# Altium PCB piezo-driver1.PcbDoc (part 2 of 2)
Units mm, origin at the board's own origin, x right, y up, seen from the top; angles counter-clockwise.
Board outline 53.7 x 52 mm, 2 copper layers (Top Layer, Bottom Layer), stack 1.569 mm thick; 104 components, 76 nets, 406 pads, 150 vias.
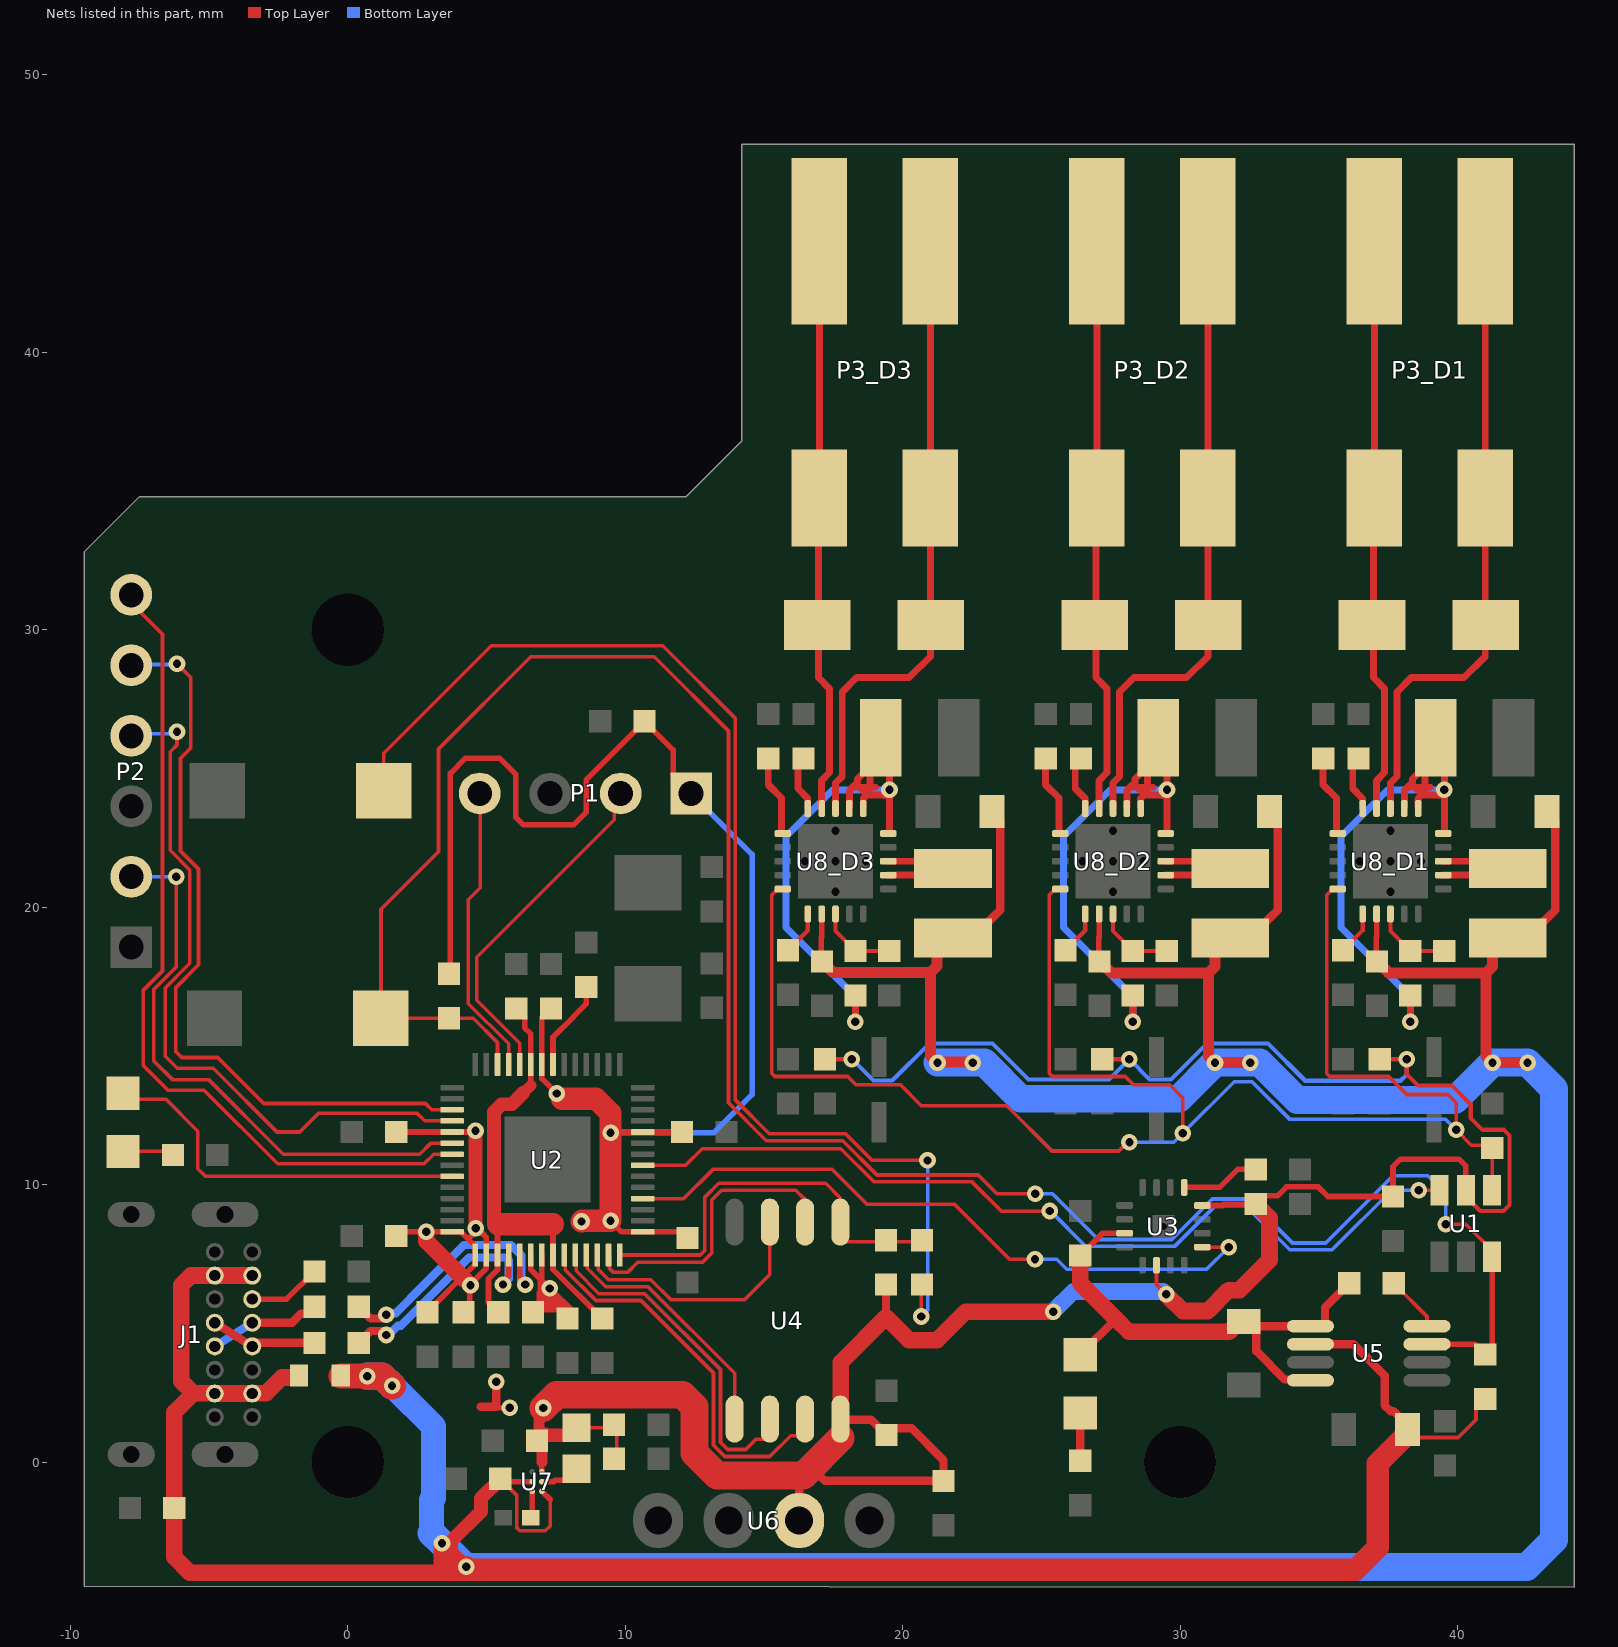
[diagram p2: the nets of this part, all layers, seen from the top]

## Via types
v1: diameter 0.6, hole 0.3, Top Layer to Bottom Layer, tented both sides, 141 vias
v2: diameter 0.6, hole 0.3, Top Layer to Bottom Layer, tented top, 9 vias

## Nets (pads, with @x,y where several pads share a name; then routed paths per layer and width w, separated by ;. In a path a pad name is that pad's centre, name@x,y a point inside that pad or via, vN(x,y) a via of type N, cw(c..) or ccw(c..) an arc to the next point about the centre after c; other vN are vias at no path point) (continued)
NetC29_D1_1: C29_D1.1 R18_D1.2 U8_D1.10 U8_D1.11 U8_D1.12 | length 23.3
  Top Layer w0.25: U8_D1.12@38.082,23.603 38.087,23.608 38.087,24.213 38.198,24.324 ; v1(38.298,15.874) R18_D1.2@38.298,16.824 ; U8_D1.11@38.582,23.603 38.582,23.918 38.702,24.039 ; 39.023,24.324 38.823,24.324 ; v1@39.348,24.024 39.333,24.039 38.702,24.039 ; U8_D1.10@39.527,22.658 v1(39.527,24.232) 39.527,25.806 C29_D1.1@39.219,26.114 38.823,25.718 C29_D1.1@38.823,25.068 ; 38.198,24.324 38.46,24.324 ; 38.198,24.324 38.373,24.499 38.373,24.618 C29_D1.1@38.823,25.068 ; 38.46,24.324 38.658,24.324 ; 38.46,24.324 38.702,24.082 38.702,24.039 ; 38.658,24.324 38.823,24.324 ; 38.658,24.324 38.823,24.159 ; 38.702,24.039 38.823,24.159 ; 38.823,24.159 38.823,24.324 ; 38.823,24.324 C29_D1.1@38.823,25.068
  Bottom Layer w0.25: v1(38.298,15.874) 38.298,16.362 38.298,16.774 35.798,19.274 35.798,22.549 37.481,24.232 v1(39.527,24.232)
NetC29_D2_1: C29_D2.1 R18_D2.2 U8_D2.10 U8_D2.11 U8_D2.12 | length 23.3
  Top Layer w0.25: U8_D2.12@28.082,23.603 28.087,23.608 28.087,24.213 28.198,24.324 ; v1(28.298,15.874) R18_D2.2@28.298,16.824 ; U8_D2.11@28.582,23.603 28.582,23.918 28.703,24.039 ; 29.023,24.324 28.823,24.324 ; v1@29.348,24.024 29.333,24.039 28.703,24.039 ; U8_D2.10@29.527,22.658 v1(29.527,24.232) 29.527,25.806 C29_D2.1@29.219,26.114 28.823,25.718 C29_D2.1@28.823,25.068 ; 28.198,24.324 28.461,24.324 ; 28.198,24.324 28.373,24.499 28.373,24.618 C29_D2.1@28.823,25.068 ; 28.461,24.324 28.658,24.324 ; 28.461,24.324 28.703,24.082 28.703,24.039 ; 28.658,24.324 28.823,24.324 ; 28.658,24.324 28.823,24.159 ; 28.703,24.039 28.823,24.159 ; 28.823,24.159 28.823,24.324 ; 28.823,24.324 C29_D2.1@28.823,25.068
  Bottom Layer w0.25: v1(28.298,15.874) 28.298,16.362 28.298,16.774 25.798,19.274 25.798,22.549 27.481,24.232 v1(29.527,24.232)
NetC29_D3_1: C29_D3.1 R18_D3.2 U8_D3.10 U8_D3.11 U8_D3.12 | length 23.3
  Top Layer w0.25: U8_D3.12@18.082,23.603 18.087,23.608 18.087,24.213 18.198,24.324 ; v1(18.298,15.874) R18_D3.2@18.298,16.824 ; U8_D3.11@18.582,23.603 18.582,23.918 18.703,24.039 ; 19.023,24.324 18.823,24.324 ; v1@19.348,24.024 19.333,24.039 18.703,24.039 ; U8_D3.10@19.527,22.658 v1(19.527,24.232) 19.527,25.806 C29_D3.1@19.219,26.114 18.823,25.718 C29_D3.1@18.823,25.068 ; 18.198,24.324 18.461,24.324 ; 18.198,24.324 18.373,24.499 18.373,24.618 C29_D3.1@18.823,25.068 ; 18.461,24.324 18.658,24.324 ; 18.461,24.324 18.703,24.082 18.703,24.039 ; 18.658,24.324 18.823,24.324 ; 18.658,24.324 18.823,24.159 ; 18.703,24.039 18.823,24.159 ; 18.823,24.159 18.823,24.324 ; 18.823,24.324 C29_D3.1@18.823,25.068
  Bottom Layer w0.25: v1(18.298,15.874) 18.298,16.362 18.298,16.774 15.798,19.274 15.798,22.549 17.481,24.232 v1(19.527,24.232)
NetC30_D1_1: C30_D1.1 U8_D1.1 | length 1.6
  Top Layer w0.15: C30_D1.1@35.873,18.449 36.582,19.158 U8_D1.1@36.582,19.758
NetC30_D2_1: C30_D2.1 U8_D2.1 | length 1.6
  Top Layer w0.15: C30_D2.1@25.873,18.449 26.582,19.158 U8_D2.1@26.582,19.758
NetC30_D3_1: C30_D3.1 U8_D3.1 | length 1.6
  Top Layer w0.15: C30_D3.1@15.873,18.449 16.582,19.158 U8_D3.1@16.582,19.758
NetD1_1: D1.1 U2.37 | length 13.9
  Top Layer w0.13: D1.1@-8.1,13.3 -7.875,13.075 -6.55,13.075 -5.4,11.925 -5.4,10.575 -5.125,10.3 U2.37@3.765,10.3
NetD1_2: D1.2 R10.2 | length 1.9
  Top Layer w0.13: D1.2@-8.1,11.2 -6.425,11.2 R10.2@-6.3,11.075
NetD2_2: D2.2 R12.2 | length 1.7
  Top Layer w0.3: R12.2@26.4,0.05 D2.2@26.4,1.775
NetJ1_A5: J1.A5 R8.2 | length 2.7
  Top Layer w0.2: J1.A5@-3.44,5.875 -2.2,5.875 R8.2@-1.2,6.875
NetL2_D1_1: L2_D1.1 U8_D1.7 U8_D1.8 | length 4.9
  Top Layer w0.25: U8_D1.7@39.452,21.158 41.577,21.158 L2_D1.1@41.814,21.395 41.551,21.658 U8_D1.8@39.452,21.658
NetL2_D2_1: L2_D2.1 U8_D2.7 U8_D2.8 | length 4.9
  Top Layer w0.25: U8_D2.7@29.452,21.158 31.577,21.158 L2_D2.1@31.814,21.395 31.551,21.658 U8_D2.8@29.452,21.658
NetL2_D3_1: L2_D3.1 U8_D3.7 U8_D3.8 | length 4.9
  Top Layer w0.25: U8_D3.7@19.452,21.158 21.577,21.158 L2_D3.1@21.814,21.395 21.551,21.658 U8_D3.8@19.452,21.658
NetPL2_1: PL2.1 R2.2 | length 45.2
  Top Layer w0.13: PL2.1@1.3,24.2 1.3,25.55 5.175,29.425 11.35,29.425 13.975,26.8 13.975,13.053 15.189,11.839 17.943,11.839 18.907,10.875 v1(20.9,10.875) ; v1(20.675,5.25) 20.675,6.375 R2.2@20.7,6.4
  Bottom Layer w0.13: v1(20.675,5.25) 20.9,5.475 v1(20.9,10.875)
NetR4_1: R4.1 U2.21 | length 3.3
  Top Layer w0.2: U2.21@7.4,14.335 7.4,15.314 8.15,16.064 8.15,16.075 8.6,16.525 R4.1@8.6,17.125
NetR11_1: R11.1 U5.8 | length 2
  Top Layer w0.13: R11.1@37.7,6.45 38.9,5.25 U5.8@38.9,4.9
NetR15_1: R15.1 U7.C1 | length 1.1
  Top Layer w0.2: R15.1@6.6,-2.1 6.65,-2.05 U7.C1@6.65,-1.05
NetR18_D1_1: R18_D1.1 R19_D1.2 U8_D1.3 | length 2.9
  Top Layer w0.15: U8_D1.3@37.582,19.758 37.582,19.14 R18_D1.1@38.298,18.424 39.52,18.424 R19_D1.2@39.522,18.422
NetR18_D2_1: R18_D2.1 R19_D2.2 U8_D2.3 | length 2.9
  Top Layer w0.15: U8_D2.3@27.582,19.758 27.582,19.14 R18_D2.1@28.298,18.424 29.52,18.424 R19_D2.2@29.522,18.422
NetR18_D3_1: R18_D3.1 R19_D3.2 U8_D3.3 | length 2.9
  Top Layer w0.15: U8_D3.3@17.582,19.758 17.582,19.14 R18_D3.1@18.298,18.424 19.52,18.424 R19_D3.2@19.522,18.422
P1.1V: C12.1 C13.1 C14.1 U2.23 U2.45 U2.50 | length 18.5
  Top Layer w0.2: C14.1@5.425,5.4 5.075,5.75 5.075,6.61 5.4,6.935 U2.45@5.4,7.465 5.4,8.2 5.6,8.4 ; C13.1@6.075,16.35 6.375,16.05 6.375,15.65 6.6,15.425 U2.23@6.6,14.335 6.6,13.575 ; 7.4,8.575 U2.50@7.4,7.465 7.4,6.95 C12.1@9.175,5.175
  Top Layer w0.4: 5.275,8.725 5.6,8.4 ; 6.325,13.3 6.6,13.575
  Top Layer w0.5: 5.275,8.725 5.275,12.625 5.55,12.9 5.925,12.9 6.325,13.3
  Top Layer w0.8: 5.425,8.575 7.4,8.575
P3.3V: C1.1 C2.1 C3.1 C4.1 C5.1 C6.1 C7.1 C8.1 C9.1 C10.1 C11.1 C15.2 C19.1 C25.1 C27.1 L1.2 P1.1 R1.1 R3.2 R13.2 R14.2 R17_D1.1 R17_D2.1 R17_D3.1 U1.5 U2.1 U2.10 U2.22 U2.33 U2.42 U2.43 U2.44 U2.48 U2.49 U3.10 U3.16 U4.8 U6.2 U7.A2 | length 195.4
  Top Layer w0.13: L1.2@8.3,1.235 9.585,1.235 9.7,1.35 R13.2@9.7,0.125 ; U3.10@29.2,7.05 U3.10@29.15,7.1 29.15,6.4 v1(29.5,6.05)
  Top Layer w0.15: R17_D3.1@17.198,14.524 v1(18.173,14.524) ; R17_D2.1@27.198,14.524 v1(28.173,14.524) ; R17_D1.1@37.198,14.524 v1(38.173,14.524) 38.173,13.977 38.575,13.575 39.8,13.575 40.475,12.9 40.475,12.4 40.897,11.978 41.673,11.978 41.875,11.776 41.875,9.274 41.656,9.055 40.82,9.055 40.3,9.575 U1.5@40.3,9.8
  Top Layer w0.2: C3.1@1.75,8.15 1.9,8.3 v1(2.832,8.3) U2.42@3.765,8.3 4.085,8.3 4.342,8.043 ; C4.1@1.75,11.9 U2.33@3.765,11.9 4.555,11.9 v1(4.605,11.95) ; C1.1@2.875,5.4 3.175,5.7 3.175,5.72 4.127,6.673 ; R1.1@3.65,17.6 3.7,17.65 3.7,24.825 4.25,25.375 5.475,25.375 6.05,24.8 6.05,23.25 6.325,22.975 8.15,22.975 8.6,23.425 8.6,24.6 C9.1@10.7,26.7 11.73,25.67 11.73,24.75 P1.1@12.38,24.1 ; C11.1@4.175,5.4 C11.1@4.475,5.1 ; C11.1@4.4,5.4 v1@4.4,6.4 ; v1@4.612,8.441 v1@4.625,8.427 ; v1@4.612,11.937 v1@4.625,11.95 ; v1(4.618,8.427) 4.618,8.332 v1@4.7,8.25 ; 4.795,2 4.795,1.962 v1(5.837,1.962) ; 5.35,2 5.35,2.075 ; C8.1@6.6,5.7 C8.1@6.9,5.4 ; U2.48@6.6,7.465 6.6,6.935 6.868,6.668 ; U7.A2@7,-0.35 7,0.01 ; U2.49@7,7.465 7,6.55 ; C5.1@7.325,16.35 7,16.025 U2.22@7,14.335 7,13.825 v1@7.725,13.1 ; C2.1@8.15,5.4 7.95,5.6 ; v1(9.475,8.7) 9.875,8.3 U2.1@10.635,8.3 12.025,8.3 C6.1@12.25,8.075 ; v1(9.475,11.875) 9.5,11.9 U2.10@10.635,11.9 C7.1@12.052,11.9 ; U3.16@30.8,9.25 31.515,9.25 31.565,9.3 C19.1@32.725,9.3 33.025,9.6 33.514,9.6 33.834,9.92 34.98,9.92 35.325,9.575 C10.1@37.675,9.575 37.675,10.65 37.95,10.925 40.05,10.925 40.3,10.675 U1.5@40.3,9.8 ; 4.127,6.673 4.6,7.145 U2.43@4.6,7.465 4.6,7.785 4.342,8.043 ; 4.127,6.673 v1@4.4,6.4 ; 4.342,8.043 4.55,8.25 v1@4.7,8.25 ; v1@4.4,6.4 v1(4.425,6.375) 4.425,6.413 5,6.988 U2.44@5,7.465 5,8.1 4.85,8.25 v1@4.7,8.25 ; 6.868,6.668 6.937,6.598 6.937,6.137 ; 6.868,6.668 6.882,6.668 7,6.55 ; C8.1@6.9,5.4 6.9,5.85 ; C8.1@6.9,5.4 C8.1@7,5.5 ; 6.9,5.85 6.9,6.1 6.937,6.137 ; 6.9,5.85 7,5.95 ; 6.937,6.137 v1@7,6.2 ; 6.937,6.137 7,6.137 ; C8.1@7,5.5 7.141,5.641 7.2,5.7 7.34,5.7 7.421,5.781 ; C8.1@7,5.5 7,5.95 ; 7,5.95 7,6.137 ; 7,5.95 7.003,5.953 7.388,5.953 ; 7,6.137 v1@7,6.2 ; 7,6.137 v1@7.204,6.137 ; v1@7,6.2 v1@7,6.341 ; v1@7,6.341 v1@7.204,6.137 ; v1@7,6.341 7,6.482 ; 7,6.482 7,6.55 ; 7,6.482 7.068,6.482 ; 7,6.55 7.068,6.482 ; 7.068,6.482 v1(7.288,6.262) 7.509,6.041 ; v1@7.204,6.137 7.388,5.953 ; 7.388,5.953 7.421,5.953 ; 7.388,5.953 7.421,5.921 ; 7.421,5.781 7.421,5.921 ; 7.421,5.781 7.421,5.641 7.7,5.641 ; 7.421,5.921 7.421,5.953 ; 7.421,5.921 7.7,5.641 ; 7.421,5.953 7.509,6.041 ; 7.509,6.041 7.95,5.6 ; 7.7,5.641 7.7,5.6 7.95,5.6
  Top Layer w0.3: 4.795,2 5.35,2 ; 5.35,2.075 v1(5.35,2.9) ; U6.2@16.27,-2.1 16.27,-0.635 16.425,-0.48 ; 16.7,-0.175 16.715,-0.19 17.2,-0.675 C25.1@21.475,-0.675 21.475,0.069 20.319,1.225 19.675,1.225 C15.2@19.425,0.975 18.875,1.525 17.78,1.525 U4.8@17.8,1.545 ; 19.4,5.225 R3.2@19.4,6.4
  Top Layer w0.4: v1@6.875,2.125 6.9,2.1 6.9,0.775 7.008,0.667 7.008,0.01
  Top Layer w0.5: v1@4.612,8.441 v1@4.612,11.937 ; C27.1@6.9,0.775 C27.1@7.095,0.97 ; C27.1@7.125,1 C27.1@7.095,0.97 ; 7.141,5.641 7.421,5.641 ; L1.2@8.3,1.235 8.3,1.23 8.04,0.97 C27.1@7.095,0.97
  Top Layer w0.6: v1(2.832,8.3) 2.832,7.968 4.127,6.673 4.4,6.4 v1(4.425,6.375) ; U4.8@17.775,0.87 17.775,3.6 19.4,5.225 20.225,4.4 21.25,4.4 22.275,5.425 v1(25.425,5.425) ; v1(29.5,6.05) 30.1,5.45 31,5.45 31.75,6.2 32.143,6.2 33.225,7.282 33.225,8.8 C19.1@32.725,9.3
  Top Layer w0.8: v1@7.725,13.1 8.95,13.1 9.475,12.575 v1(9.475,11.875) v1(9.475,8.7) 8.45,8.7 v1(8.425,8.675)
  Top Layer w1: v1(7.05,1.95) 7.525,2.425 12.075,2.425 12.5,2 12.5,0.326 13.306,-0.48 16.425,-0.48 U4.8@17.775,0.87
  Bottom Layer w0.15: v1(18.173,14.524) 18.947,13.75 19.626,13.75 20.971,15.095 23.238,15.095 24.538,13.795 27.444,13.795 v1(28.173,14.524) 28.902,13.795 29.671,13.795 30.971,15.095 33.163,15.095 34.513,13.745 37.95,13.745 38.173,13.968 v1(38.173,14.524)
  Bottom Layer w0.2: v1(9.475,11.875) 13.2,11.875 14.575,13.25 14.575,21.905 P1.1@12.38,24.1
  Bottom Layer w0.6: v1(25.425,5.425) 26.15,6.15 29.4,6.15 v1(29.5,6.05)
  other v1: 7.535,13.284
P3.3VA: C20.1 C23.1 D2.1 R11.2 U3.7 U5.1 U5.4 | length 19.7
  Top Layer w0.2: C20.1@26.4,7.45 27.2,8.25 U3.7@28,8.25
  Top Layer w0.3: D2.1@26.4,3.875 27.688,5.163 ; C23.1@32.3,5.075 32.45,5.075 C23.1@32.625,4.9 ; U5.4@34.7,2.95 34.671,2.979 33.771,2.979 32.75,4 32.75,4.775 C23.1@32.625,4.9 ; R11.2@36.1,6.45 35.225,5.575 35.225,4.969 35.156,4.9 U5.1@34.7,4.9 C23.1@32.625,4.9
  Top Layer w0.6: C20.1@26.4,7.45 26.4,6.45 27.688,5.163 28.15,4.7 31.775,4.7 32,4.925 32.15,4.925 C23.1@32.3,5.075
P5.0V: C21.1 C22.1 C26.1 C28_D1.1 C28_D2.1 C28_D3.1 C31_D1.1 C31_D2.1 C31_D3.1 J1.A4 J1.A9 J1.B4 J1.B9 J2.1 L2_D1.2 L2_D2.2 L2_D3.2 R9.1 U5.2 U7.B1 U7.C2 U8_D1.2 U8_D2.2 U8_D3.2 | length 232.1
  Top Layer w0.13: C26.1@5.5,-0.6 5.6,-0.7 6.1,-1.2 6.1,-2.375 6.2,-2.475 7.125,-2.475 7.3,-2.3 7.3,-1.35 ; C22.1@38.2,1.175 38.485,0.89 40.027,0.89 40.665,1.528 40.665,1.94 R9.1@41,2.275
  Top Layer w0.2: C26.1@5.6,-0.7 U7.B1@6.65,-0.7 ; U7.C2@7,-1.05 7.3,-1.35 ; 17.073,18.924 17.073,18.074 C31_D3.1@17.098,18.049 ; 17.082,18.924 U8_D3.2@17.082,19.758 ; 27.073,18.924 27.073,18.074 C31_D2.1@27.098,18.049 C31_D2.1@27.373,18.324 ; 27.082,18.924 U8_D2.2@27.082,19.758 ; 37.073,18.924 37.073,18.074 C31_D1.1@37.098,18.049 C31_D1.1@37.373,18.324 ; 37.082,18.924 U8_D1.2@37.082,19.758
  Top Layer w0.3: L2_D3.2@21.814,18.895 22.514,18.895 23.276,19.657 23.281,19.657 23.523,19.899 23.523,22.449 23.518,22.454 23.518,23.147 C28_D3.1@23.218,23.447 ; L2_D2.2@31.814,18.895 32.514,18.895 33.276,19.657 33.281,19.657 33.523,19.899 33.523,22.449 33.518,22.454 33.518,23.147 C28_D2.1@33.218,23.447 ; U5.2@34.7,4.25 36.25,4.25 37.375,3.125 37.375,2.05 37.587,1.838 37.687,1.838 38.2,1.325 C22.1@38.2,1.175 C22.1@38.2,1.025 ; L2_D1.2@41.814,18.895 42.514,18.895 43.276,19.657 43.281,19.657 43.523,19.899 43.523,22.449 43.518,22.454 43.518,23.147 C28_D1.1@43.218,23.447
  Top Layer w0.4: C31_D3.1@17.098,18.049 17.497,17.65 21,17.65 ; L2_D3.2@21.814,18.895 21.734,18.895 21.234,18.395 21.234,17.884 21,17.65 ; v1@22.5,14.425 21.234,14.425 21,14.659 21,17.65 ; C31_D2.1@27.123,18.024 27.522,17.625 31.025,17.625 ; L2_D2.2@31.259,18.37 31.259,17.859 31.025,17.625 ; v1(32.525,14.4) v1(31.259,14.4) 31.025,14.634 31.025,17.625 ; C31_D1.1@37.123,18.024 37.522,17.625 41.025,17.625 ; L2_D1.2@41.259,18.37 41.259,17.859 41.025,17.625 ; v1(42.525,14.4) v1(41.259,14.4) 41.025,14.634 41.025,17.625
  Top Layer w0.5: v1(3.4,-2.925) 3.419,-2.906 3.669,-2.906 3.725,-2.85 ; 3.725,-3.225 3.725,-2.85 ; C26.1@5.5,-0.6 4.8,-1.3 4.8,-1.775 3.725,-2.85
  Top Layer w0.6: J1.A4@-3.44,6.725 J1.B9@-4.79,6.725 -5.649,6.725 -6,6.374 -6,2.925 -5.56,2.485 ; J2.1@-1.75,3.1 -1.75,3.075 -1.775,3.05 -2.375,3.05 -2.94,2.485 -3.43,2.485 J1.A9@-3.44,2.475 J1.B4@-4.79,2.475 -4.8,2.485 -5.56,2.485 ; v1(3.4,-2.925) v1@3.4,-2.975 ; 5.275,-3.88 5.175,-3.98 v1@4.07,-3.98 ; -5.56,2.485 -6.25,1.794 C21.1@-6.25,-1.65 -6.25,-3.425 -5.695,-3.98 3.45,-3.98 ; v1@3.4,-2.975 3.4,-3.93 3.45,-3.98 ; v1@3.4,-2.975 4.2,-3.775 v1(4.275,-3.775) v1@4.07,-3.98 ; 3.45,-3.98 v1@4.07,-3.98
  Top Layer w0.8: v1(4.275,-3.775) 4.38,-3.88 5.275,-3.88 36.32,-3.88 37.125,-3.075 37.125,-0.05 C22.1@38.2,1.025
  Top Layer w0.9: J2.1@-0.25,3.1 v1(0.7,3.1)
  Top Layer w1: v1(0.7,3.1) 1.25,3.1 v1(1.6,2.75)
  Bottom Layer w0.9: v1(1.6,2.75) 1.634,2.75 3.1,1.284 3.1,-1.284 3.025,-1.359 3.025,-2.55
  Bottom Layer w1: v1@0.725,3.1 1.25,3.1 v1(1.6,2.75) ; 3.025,-2.55 v1(3.4,-2.925) 4.255,-3.78 42.495,-3.78 43.48,-2.795 43.48,13.445 v1(42.525,14.4) v1(41.259,14.4) 39.909,13.05 34.225,13.05 32.875,14.4 v1(32.525,14.4) v1(31.259,14.4) 29.959,13.1 24.25,13.1 22.95,14.4 v1(22.525,14.4) v1(21.259,14.4)
PIEZO__EN: U1.6 U2.7 | length 32.6
  Top Layer w0.13: U2.7@10.635,10.7 12.175,10.7 12.775,11.3 17.775,11.3 18.975,10.1 22.5,10.1 23.55,9.05 v1(25.3,9.05) ; v1(38.6,9.8) U1.6@39.35,9.8
  Bottom Layer w0.13: v1(25.3,9.05) 25.329,9.05 26.604,7.775 29.8,7.775 31.26,9.235 32.365,9.235 33.95,7.65 35.475,7.65 37.625,9.8 v1(38.6,9.8)
PIEZO_D1_N: D4_D1.1 P3_D1.2 U8_D1.14 | length 20.7
  Top Layer w0.25: P3_D1.2@37,44 P3_D1.2@37,34.75 36.973,34.723 36.973,28.274 37.373,27.874 37.373,24.849 37.082,24.558 U8_D1.14@37.082,23.603
PIEZO_D1_P: D4_D1.2 P3_D1.1 U8_D1.13 | length 22.9
  Top Layer w0.25: U8_D1.13@37.582,23.603 37.582,24.474 37.825,24.717 37.825,27.765 38.333,28.273 40.238,28.273 41,29.035 P3_D1.1@41,34.75 P3_D1.1@41,44
PIEZO_D2_N: D4_D2.1 P3_D2.2 U8_D2.14 | length 20.7
  Top Layer w0.25: P3_D2.2@27,44 P3_D2.2@27,34.75 26.973,34.723 26.973,28.274 27.373,27.874 27.373,24.849 27.082,24.558 U8_D2.14@27.082,23.603
PIEZO_D2_P: D4_D2.2 P3_D2.1 U8_D2.13 | length 22.9
  Top Layer w0.25: U8_D2.13@27.582,23.603 27.582,24.474 27.825,24.717 27.825,27.765 28.333,28.273 30.238,28.273 31,29.035 P3_D2.1@31,34.75 P3_D2.1@31,44
PIEZO_D3_N: D4_D3.1 P3_D3.2 U8_D3.14 | length 20.7
  Top Layer w0.25: P3_D3.2@17,44 P3_D3.2@17,34.75 16.973,34.723 16.973,28.274 17.373,27.874 17.373,24.849 17.082,24.558 U8_D3.14@17.082,23.603
PIEZO_D3_P: D4_D3.2 P3_D3.1 U8_D3.13 | length 22.9
  Top Layer w0.25: U8_D3.13@17.582,23.603 17.582,24.474 17.825,24.717 17.825,27.765 18.333,28.273 20.238,28.273 21,29.035 P3_D3.1@21,34.75 P3_D3.1@21,44
PIEZO_GATED_EN: R5.1 U1.4 U8_D1.20 U8_D2.20 U8_D3.20 | length 64
  Top Layer w0.13: U8_D3.20@15.682,20.658 15.502,20.658 15.288,20.444 15.288,14.01 15.399,13.899 18.023,13.899 18.323,13.599 19.926,13.599 20.675,12.85 23.75,12.85 25.385,11.215 27.785,11.215 28.095,11.525 v1(28.175,11.525) ; U8_D2.20@25.682,20.658 25.502,20.658 25.288,20.444 25.288,14.01 25.399,13.899 28.023,13.899 28.323,13.599 29.623,13.599 30.1,13.122 v1(30.1,11.85) ; U8_D1.20@35.682,20.658 35.502,20.658 35.288,20.444 35.288,14.01 35.399,13.899 37.526,13.899 38.175,13.25 39.65,13.25 39.95,12.95 v1(39.95,11.975) 40.5,11.425 41.15,11.425 R5.1@41.25,11.325 U1.4@41.25,9.8
  Bottom Layer w0.13: v1(28.175,11.525) 29.775,11.525 v1(30.1,11.85) 30.1,11.865 31.95,13.715 32.591,13.715 33.941,12.365 39.56,12.365 v1(39.95,11.975)
QSPI_CSN: R2.1 R3.1 U2.56 U4.1 | length 14.9
  Top Layer w0.13: U2.56@9.8,7.465 12.702,7.465 12.875,7.638 12.875,8.95 12.875,9.554 13.371,10.05 13.975,10.05 17.225,10.05 17.755,9.52 17.755,7.95 19.4,7.95 20.65,7.95 R2.1@20.7,8
QSPI_SCK: U2.52 U4.6 | length 12.4
  Top Layer w0.13: U2.52@8.2,7.465 8.235,7.43 8.235,6.894 9.054,6.075 10.7,6.075 13.435,3.34 13.435,0.714 13.694,0.455 14.344,0.455 14.715,0.826 14.975,0.826 15.215,1.066 U4.6@15.215,1.45
QSPI_SD0: U2.53 U4.5 | length 9.7
  Top Layer w0.13: U2.53@8.6,7.465 8.635,7.43 8.635,6.99 9.3,6.325 10.821,6.325 13.945,3.201 U4.5@13.945,0.85
QSPI_SD1: U2.55 U4.2 | length 11.6
  Top Layer w0.13: U2.55@9.4,7.465 9.435,7.43 9.435,6.976 9.561,6.85 10.1,6.85 10.45,7.2 12.79,7.2 13.125,7.535 13.125,9.45 13.475,9.8 16.15,9.8 16.485,9.465 U4.2@16.485,7.95
QSPI_SD2: U2.54 U4.3 | length 8.7
  Top Layer w0.13: U2.54@9,7.465 9.035,7.43 9.035,6.944 9.404,6.575 10.925,6.575 11.65,5.85 14.3,5.85 15.215,6.765 U4.3@15.215,7.95
QSPI_SD3: U2.51 U4.7 | length 14.2
  Top Layer w0.13: U2.51@7.8,7.465 7.835,7.43 7.835,6.94 8.95,5.825 10.575,5.825 13.185,3.215 13.185,0.61 13.59,0.205 15.216,0.205 15.965,0.954 16.245,0.954 16.485,1.194 U4.7@16.485,1.45
REF_DNP: C16.1 U3.1 | length 2.8
  Top Layer w0.2: U3.1@30.15,9.9 31.425,9.9 32.075,10.55 C16.1@32.725,10.55
RESET_N: PL1.1 R1.2 R9.2 U1.3 U2.26 U5.7 | length 81.9
  Top Layer w0.13: U2.26@5.4,14.335 5.4,15.121 4.521,16 R1.2@3.65,16 PL1.1@1.2,16 1.2,19.925 3.275,22 3.275,25.7 6.6,29.025 11.05,29.025 13.725,26.35 13.725,12.95 15.086,11.589 17.839,11.589 19.078,10.35 22.725,10.35 23.4,9.675 v1(24.775,9.675) ; v1(39.575,8.575) 40.3,8.575 41.25,7.625 U1.3@41.25,7.4
  Top Layer w0.2: U5.7@38.9,4.25 40.625,4.25 R9.2@41,3.875 41.25,4.125 U1.3@41.25,7.4
  Bottom Layer w0.13: v1(24.775,9.675) 25.4,9.675 27.05,8.025 29.696,8.025 31.156,9.485 32.469,9.485 34.054,7.9 35.25,7.9 37.675,10.325 38.925,10.325 39.575,9.675 v1(39.575,8.575)
REXT_D1: R20_D1.1 U8_D1.15 | length 2
  Top Layer w0.25: R20_D1.1@36.428,25.362 36.223,25.157 36.223,24.277 36.582,23.918 U8_D1.15@36.582,23.603
REXT_D2: R20_D2.1 U8_D2.15 | length 2
  Top Layer w0.25: R20_D2.1@26.428,25.362 26.223,25.157 26.223,24.277 26.582,23.918 U8_D2.15@26.582,23.603
REXT_D3: R20_D3.1 U8_D3.15 | length 2
  Top Layer w0.25: R20_D3.1@16.428,25.362 16.223,25.157 16.223,24.277 16.582,23.918 U8_D3.15@16.582,23.603
RPUSB_N: R6.2 U2.46 | length 8.8
  Top Layer w0.2: v1@5.6,6.5 5.8,6.7 U2.46@5.8,7.465
  Top Layer w0.3: R6.2@0.4,4.3 0.825,4.725 v1@1.4,4.725
  Bottom Layer w0.3: v1(1.395,4.581) 1.476,4.581 1.815,4.921 1.92,4.921 3.207,6.208 4.374,7.375 5.7,7.375 5.8,7.275 5.8,6.6 v1(5.6,6.4)
RPUSB_P: R7.2 U2.47 | length 9.4
  Top Layer w0.2: U2.47@6.2,7.465 6.2,6.7 v1@6.4,6.5
  Top Layer w0.3: R7.2@0.4,5.6 0.825,5.175 v1@1.4,5.175
  Bottom Layer w0.3: v1(1.395,5.313) 1.452,5.371 1.734,5.371 2.757,6.394 4.188,7.825 5.886,7.825 6.25,7.461 6.25,6.55 v1(6.4,6.4)
SCLK: U2.4 U3.13 | length 24.3
  Top Layer w0.13: U2.4@10.635,9.5 12.114,9.5 13.164,10.55 17.464,10.55 18.714,9.3 21.871,9.3 23.855,7.316 v1(24.772,7.316) ; U3.13@30.8,7.75 v1(31.75,7.75)
  Bottom Layer w0.13: v1(24.772,7.316) 25.559,7.316 25.92,6.955 30.955,6.955 v1(31.75,7.75)
SW_3.3V: L1.1 U7.B2 | length 1.5
  Top Layer w0.2: U7.B2@7,-0.7 7.42,-0.7 7.47,-0.65 7.89,-0.65 8.3,-0.24 L1.1@8.3,-0.235
SWC: P1.2 U2.24 | length 12.6
  Top Layer w0.13: U2.24@6.2,14.335 6.2,15.1 4.65,16.65 4.65,18.2 9.605,23.155 9.605,23.865 P1.2@9.84,24.1
SWD: P1.4 U2.25 | length 10.5
  Top Layer w0.13: P1.4@4.76,24.1 4.775,24.085 4.775,20.7 4.35,20.275 4.35,16.525 5.8,15.075 U2.25@5.8,14.335
UART1_CTS: P2.2 U2.34 | length 21.2
  Top Layer w0.13: v1(-6.175,21.1) -6.175,17.846 -6.986,17.035 -6.986,14.461 -6.314,13.789 -5.014,13.789 -2.325,11.1 2.6,11.1 3,11.5 U2.34@3.765,11.5
  Bottom Layer w0.13: P2.2@-8.1,21.1 v1(-6.175,21.1)
UART1_RTS: P2.6 U2.35 | length 30.6
  Top Layer w0.13: P2.6@-8.1,31.26 -6.675,29.835 -6.675,17.7 -7.375,17 -7.375,14.3 -6.475,13.4 -5.175,13.4 -2.525,10.75 2.75,10.75 3.1,11.1 U2.35@3.765,11.1
UART1_RX: P2.4 U2.32 | length 26.3
  Top Layer w0.13: v1(-6.15,26.325) -6.15,25.85 -6.4,25.6 -6.4,22.05 -5.69,21.34 -5.69,17.978 -6.58,17.088 -6.58,14.63 -6.145,14.195 -4.845,14.195 -2.55,11.9 -1.725,11.9 -1.05,12.575 2.5,12.575 2.775,12.3 U2.32@3.765,12.3
  Bottom Layer w0.13: P2.4@-8.1,26.18 -8.027,26.253 -6.222,26.253 v1(-6.15,26.325)
UART1_TX: P2.5 U2.31 | length 27.7
  Top Layer w0.13: v1(-6.15,28.775) -5.65,28.275 -5.65,25.75 -6.025,25.375 -6.025,22.029 -5.375,21.379 -5.375,17.925 -6.191,17.109 -6.191,14.791 -5.984,14.584 -4.684,14.584 -3.025,12.925 2.805,12.925 3.03,12.7 U2.31@3.765,12.7
  Bottom Layer w0.13: P2.5@-8.1,28.72 -8.073,28.747 -6.178,28.747 v1(-6.15,28.775)
USB_N: J1.A7 J1.B7 R6.1 | length 3.9
  Top Layer w0.3: J1.B7@-4.79,5.025 J1.A7@-3.44,4.175 -3.315,4.3 R6.1@-1.2,4.3
USB_P: J1.A6 J1.B6 R7.1 | length 4.1
  Top Layer w0.3: J1.A6@-3.44,5.025 -2,5.025 -1.675,5.35 -1.45,5.35 R7.1@-1.2,5.6
  Bottom Layer w0.3: J1.B6@-4.79,4.175 J1.A6@-3.44,5.025
VLO_D1_N: R21_D1.1 U8_D1.16 | length 2.9
  Top Layer w0.25: R21_D1.1@35.158,25.362 35.158,24.414 35.637,23.935 U8_D1.16@35.637,22.658
VLO_D2_N: R21_D2.1 U8_D2.16 | length 2.9
  Top Layer w0.25: R21_D2.1@25.158,25.362 25.158,24.414 25.637,23.935 U8_D2.16@25.637,22.658
VLO_D3_N: R21_D3.1 U8_D3.16 | length 2.9
  Top Layer w0.25: R21_D3.1@15.158,25.362 15.158,24.414 15.637,23.935 U8_D3.16@15.637,22.658
pads on no net: J1.A8 J1.B5 J1.B8 P2.3 U2.2 U2.8 U2.9 U2.11 U2.12 U2.13 U2.14 U2.15 U2.16 U2.17 U2.18 U2.29 U2.30 U2.36 U2.38 U2.39 U2.40 U2.41 U3.5 U5.5 U8_D1.9 U8_D2.9 U8_D3.9

## Polygon pours and split planes (outlines as drawn)
GND on Bottom Layer "GND_L02_P014" (solid, remove dead copper, pour order 14): 14.798,28.524 14.798,15.499 15.298,14.999 37.926,14.999 38.925,14 43.975,14 44.075,13.9 44.15,13.975 44.15,28.6
GND on Bottom Layer "GND_L02_P011" (solid, remove dead copper, pour order 11): 12.15,34.75 12.15,23.8 14.1,21.85 14.1,13.525 14.975,12.65 39.509,12.65 40.584,13.725 40.634,13.675 43.55,13.675 44.15,13.075 44.15,-4.525 -9.425,-4.525 -9.425,34.55 -9.725,34.85
P3.3V on Bottom Layer "P3.3V_L02_P010" (solid, remove dead copper, pour order 10): 8.05,1.125 5.6,1.125 4.5,2.225 4.5,4.725 2,7.225 2,8.475 2.05,8.475 2.7,9.125 4.85,9.125 5.175,8.8 6.35,8.8 6.95,8.2 7.55,8.2 8.425,9.075 9.875,9.075 10.35,8.6 10.375,8.6 10.375,5.925 9.075,4.625 7,4.625 6.475,4.1 6.475,2.7 6.55,2.625 7.325,2.625 8.2,1.75 8.2,1.275
GND on Bottom Layer "GND_L02_P009" (solid, remove dead copper, pour order 9): 34.798,28.524 43.648,28.524 43.648,18.549 40.098,14.999 35.298,14.999 34.798,15.499 34.798,15.699
GND on Bottom Layer "GND_L02_P008" (solid, remove dead copper, pour order 8): 24.798,28.524 33.648,28.524 33.648,18.549 30.098,14.999 25.298,14.999 24.798,15.499 24.798,15.699
GND on Bottom Layer "GND_L02_P007" (solid, remove dead copper, pour order 7): 14.798,28.524 23.648,28.524 23.648,18.549 20.098,14.999 15.298,14.999 14.798,15.499 14.798,15.699
GND on Top Layer "GND_L01_P013" (solid, remove dead copper, pour order 13): 12.15,34.8 12.15,23.425 14,21.575 14,12.8 14.53,12.27 44.095,12.27 44.175,12.35 44.175,-4.5 -9.4,-4.5 -9.5,-4.6 -9.725,-4.375 -9.725,34.85
GND on Top Layer "GND_L01_P012" (solid, remove dead copper, pour order 12): 44.2,9.425 44.2,17.05 44.175,17.075 39.225,17.075 39.1,17.2 39.1,11.675 41.35,9.425

## Keep-outs
Keep-Out Layer:
  lines w0.2: -9.5,-4.5 44.2,-4.5 ; -9.5,-4.475 -9.5,32.8 -7.5,34.8 12.2,34.8 14.2,36.8 14.2,47.5 44.2,47.5 44.2,-4.475

## Other copper
Top Layer:
  rectangle net P3.3V: 4.623,1.45 7.525,2.475
  rectangle net NetL2_D2_1: 29.998,20.874 30.873,21.899
  rectangle net GND: 30.598,22.949 32.323,27.549
  rectangle net NetL2_D1_1: 39.998,20.874 40.873,21.899
  rectangle net GND: 40.598,22.949 42.323,27.549
  rectangle net NetL2_D2_1: 29.998,20.874 30.873,21.899
  rectangle net NetL2_D1_1: 39.998,20.874 40.873,21.899
  rectangle net NetL2_D2_1: 29.998,20.874 30.873,21.899
  rectangle net GND: 40.598,22.949 42.323,27.549
  rectangle net NetL2_D1_1: 39.998,20.874 40.873,21.899
  rectangle net NetL2_D2_1: 29.998,20.874 30.873,21.899
  rectangle net GND: 30.598,22.949 32.323,27.549
  rectangle net NetL2_D1_1: 39.998,20.874 40.873,21.899
  rectangle net GND: 20.598,22.949 22.323,27.549
  rectangle net NetL2_D3_1: 19.998,20.874 20.873,21.899
  region net NetC29_D2_1: 28.23,24.356 28.691,24.356 29.248,23.799 29.248,22.974 30.023,22.974 30.023,25.149 29.923,25.249 28.423,25.249 28.23,25.056
  region net NetC29_D1_1: 38.23,24.356 38.691,24.356 39.248,23.799 39.248,22.974 40.023,22.974 40.023,25.149 39.923,25.249 38.423,25.249 38.23,25.056
  region net NetC29_D2_1: 28.23,24.356 28.691,24.356 29.248,23.799 29.248,22.974 30.023,22.974 30.023,25.149 29.923,25.249 28.423,25.249 28.23,25.056
  region net NetC29_D1_1: 38.23,24.356 38.691,24.356 39.248,23.799 39.248,22.974 40.023,22.974 40.023,25.149 39.923,25.249 38.423,25.249 38.23,25.056
  region net NetC29_D2_1: 28.23,24.356 28.691,24.356 29.248,23.799 29.248,22.974 30.023,22.974 30.023,25.149 29.923,25.249 28.423,25.249 28.23,25.056
  region net NetC29_D1_1: 38.23,24.356 38.691,24.356 39.248,23.799 39.248,22.974 40.023,22.974 40.023,25.149 39.923,25.249 38.423,25.249 38.23,25.056
  region net NetC29_D2_1: 28.23,24.356 28.691,24.356 29.248,23.799 29.248,22.974 30.023,22.974 30.023,25.149 29.923,25.249 28.423,25.249 28.23,25.056
  region net NetC29_D1_1: 38.23,24.356 38.691,24.356 39.248,23.799 39.248,22.974 40.023,22.974 40.023,25.149 39.923,25.249 38.423,25.249 38.23,25.056
  region net NetC29_D3_1: 18.23,24.356 18.691,24.356 19.248,23.799 19.248,22.974 20.023,22.974 20.023,25.149 19.923,25.249 18.423,25.249 18.23,25.056

## Silkscreen, mask and mechanical layers (free items; w line width, h text height)
Top Overlay:
  rectangle: 42.25,45.75 43.75,47.5
  rectangle: 32.25,45.75 33.75,47.5
  rectangle: 22.25,45.75 23.75,47.5
  lines w0.2: -6.15,26.325 -5.075,26.325 -5.5,25.9 ; -5.75,29.125 -6.125,28.75 -5,28.75
  text "Piezo Driver" at 4.25,32.518 h2
  text "CH3" at 17.751,31.764 h1.5
  text "CH2" at 27.751,31.764 h1.5
  text "CH1" at 38.001,31.764 h1.5
  text "-" at 16.75,31.725 h1.5
  text "-" at 26.75,31.725 h1.5
  text "-" at 36.75,31.725 h1.5
  text "+" at 20.751,31.641 h1.5
  text "+" at 30.751,31.641 h1.5
  text "+" at 40.751,31.641 h1.5
  text "v1" at 4.25,31 h2
  text "bunnie" at 4.251,29.268 h2
  text "07/23" at 4.25,27.72 h1.5
  text "G" at 6.764,22.749 h1.5 r270
  text "C" at 9.514,22.749 h1.5 r270
  text "+" at 11.891,22.749 h1.5 r270
  text "SWD" at 4.514,22.499 h1.5 r270
  text "BOOT" at -4.25,20.014 h1.5
  text "G" at -6.499,18.014 h1.5
  text "1" at -8.249,16 h1.5
  text "RESET" at -4,11.764 h1.5
  text "CERN OHL-S" at 33.501,-3.732 h2
Mechanical 1:
  lines w0.2: 29,-8.6 29,51
Mechanical 15:
  lines w0.381: -9.936,63.348 0.476,63.348 34.248,63.348 49.484,63.348 65.99,63.348 80.465,63.348 ; -9.936,66.396 0.476,66.396 34.248,66.396 49.484,66.396 65.99,66.396 80.465,66.396 ; -9.936,69.444 0.476,69.444 34.248,69.444 49.484,69.444 65.99,69.444 80.465,69.444 ; -9.936,72.492 0.476,72.492 34.248,72.492 49.484,72.492 65.99,72.492 80.465,72.492 ; -9.936,75.54 0.476,75.54 34.248,75.54 49.484,75.54 65.99,75.54 80.465,75.54 ; -9.936,78.588 0.476,78.588 34.248,78.588 49.484,78.588 65.99,78.588 80.465,78.588 ; -9.936,81.636 0.476,81.636 34.248,81.636 49.484,81.636 65.99,81.636 80.465,81.636 ; -9.936,84.684 0.476,84.684 34.248,84.684 49.484,84.684 65.99,84.684 80.465,84.684 ; -9.936,87.732 80.465,87.732 ; 0.476,90.78 0.476,60.3 ; 34.248,90.78 34.248,60.3 ; 49.484,90.78 49.484,60.3 ; 65.99,90.78 65.99,60.3 ; 0.476,60.3 -9.936,60.3 -9.936,90.78 80.465,90.78 80.465,60.3 65.99,60.3 ; 0.476,60.3 34.248,60.3 ; 34.248,60.3 49.484,60.3 ; 49.484,60.3 65.99,60.3
  text "Layer" at -8.158,88.494 h1.52
  text "Name" at 2.254,88.494 h1.52
  text "Material" at 36.026,88.494 h1.52
  text "Thickness" at 51.262,88.494 h1.52
  text "Constant" at 67.768,88.494 h1.52
  text "Top Overlay" at 2.254,85.446 h1.52
  text "Top Solder" at 2.254,82.398 h1.52
  text "SM-001" at 36.026,82.398 h1.52
  text "0.025mm" at 51.262,82.398 h1.52
  text "4" at 67.768,82.398 h1.52
  text "Top Surface Finish" at 2.254,79.35 h1.52
  text "PbSn" at 36.026,79.35 h1.52
  text "0.020mm" at 51.262,79.35 h1.52
  text "1" at -8.158,76.302 h1.52
  text "Top Layer" at 2.254,76.302 h1.52
  text "CF-004" at 36.026,76.302 h1.52
  text "0.035mm" at 51.262,76.302 h1.52
  text "Dielectric 1" at 2.254,73.254 h1.52
  text "Core-043" at 36.026,73.254 h1.52
  text "1.499mm" at 51.262,73.254 h1.52
  text "4.3" at 67.768,73.254 h1.52
  text "2" at -8.158,70.206 h1.52
  text "Bottom Layer" at 2.254,70.206 h1.52
  text "CF-004" at 36.026,70.206 h1.52
  text "0.035mm" at 51.262,70.206 h1.52
  text "Bottom Surface Finish" at 2.254,67.158 h1.52
  text "PbSn" at 36.026,67.158 h1.52
  text "0.020mm" at 51.262,67.158 h1.52
  text "Bottom Solder" at 2.254,64.11 h1.52
  text "SM-001" at 36.026,64.11 h1.52
  text "0.025mm" at 51.262,64.11 h1.52
  text "4" at 67.768,64.11 h1.52
  text "Bottom Overlay" at 2.254,61.062 h1.52
  text "Total board thickness:" at -8.158,58.014 h1.52
  text "1.659mm" at 51.262,58.014 h1.52
  text "Soldermask: Green / Silkscreen: White" at -8.2,55.55 h1.5
  text "Finish: HASL" at -7.95,53.05 h1.5

## Text inside footprints (layer, text, board x,y; h text height)
J1: Mechanical 13 "PCB EDGE" at -9.37,-0.715 h0.81 r270